# Altium PCB Section_C_EXP.PcbDoc
Units mm, origin at the board's own origin, x right, y up, seen from the top; angles counter-clockwise.
Board outline 24.3 x 27.5 mm, 2 copper layers (Top Layer, Bottom Layer), stack 1.569 mm thick; 3 components, 5 nets, 20 pads, 0 vias.
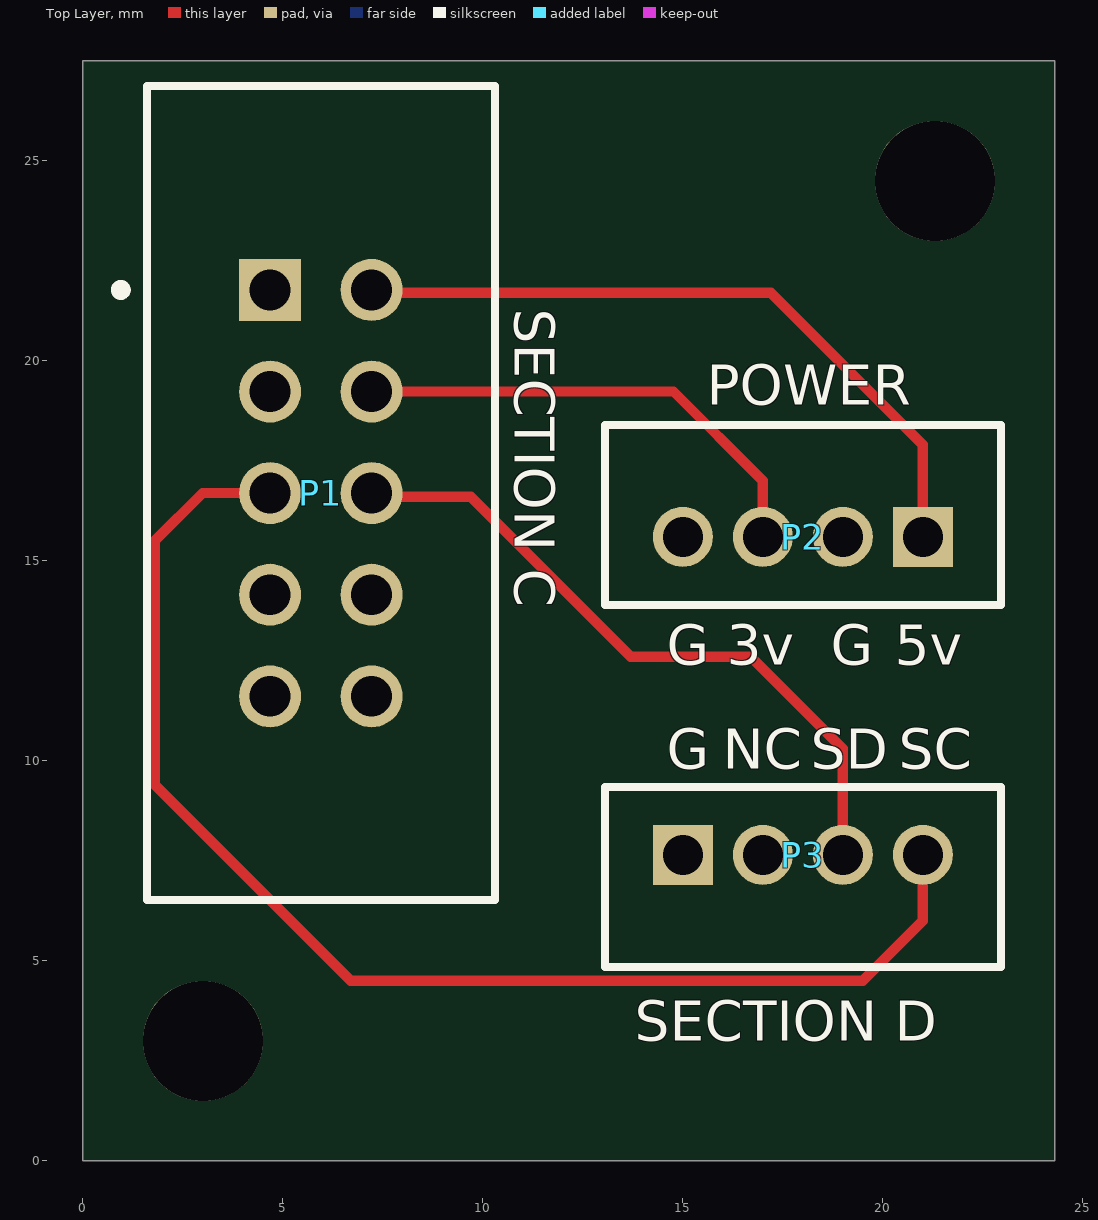
[diagram p0: Top Layer view]
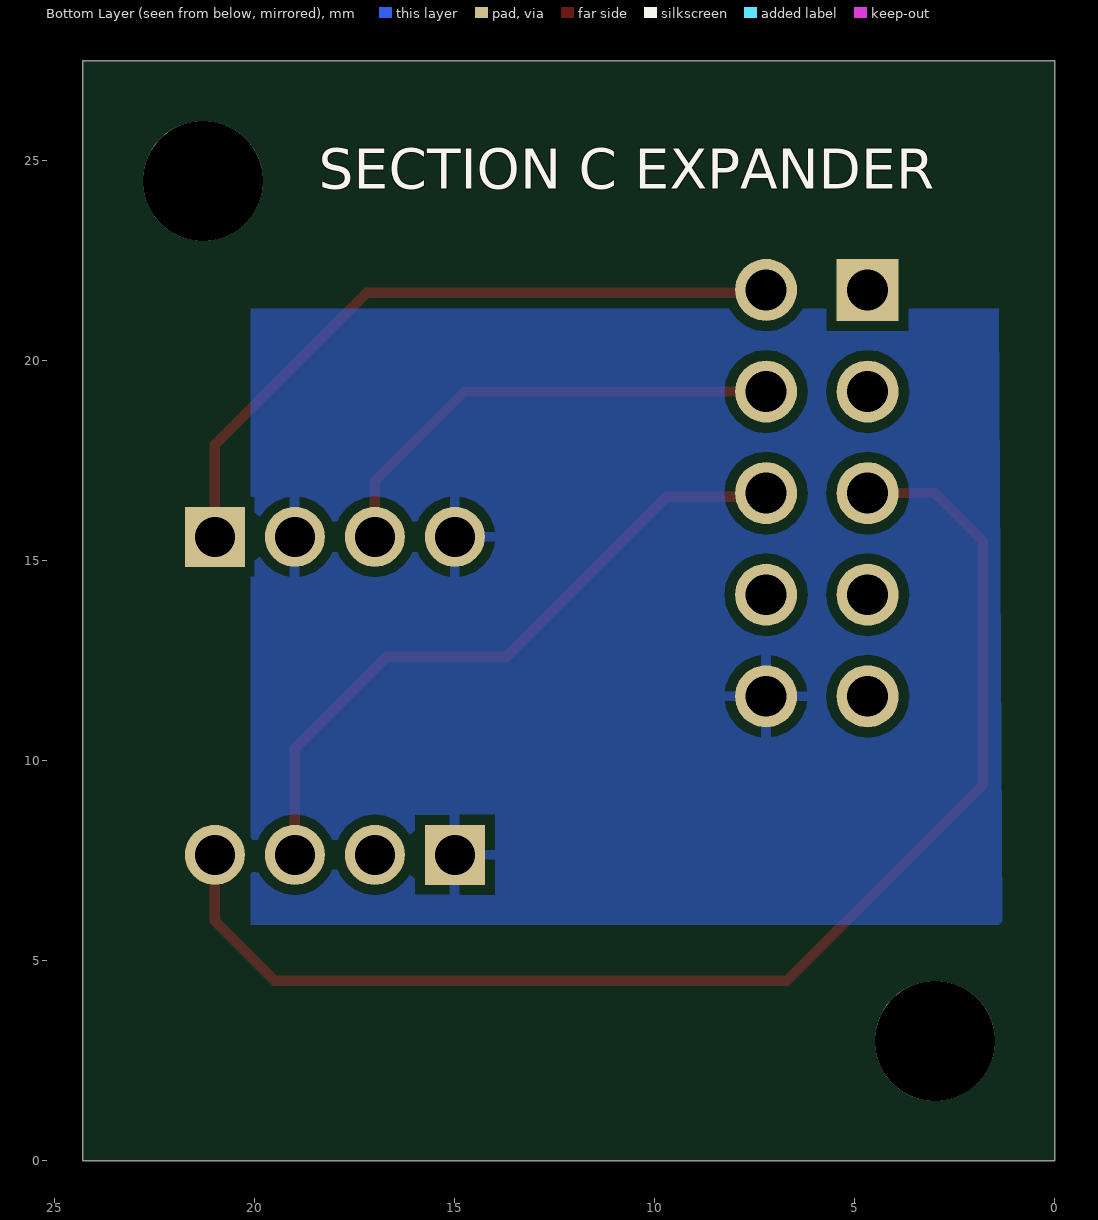
[diagram p1: Bottom Layer view, seen from below]

## Layer stack, top to bottom
Top Solder: solder mask 0.0254, SM-001, Dk 4
Top Layer: signal copper 0.035
Dielectric 1: core 1.4986, Core-043, Dk 4.3
Bottom Layer: signal copper 0.035
Bottom Solder: solder mask 0.0254, SM-001, Dk 4

## Board outline
0,0 24.3,0 24.3,27.5 0,27.5

## Design rules (kind name [scope] priority, off if disabled: settings)
Clearance [All] p1: gap=0.254 ignorepadtopadclearanceinfootprint=FALSE except(0: Arc-Hole Track-Hole SMDPad-Hole THPad-Hole Via-Hole Fill-Hole Poly-Hole Region-Hole Text-Hole)
PolygonConnect [All] p1: connectstyle=Relief reliefconductorwidth=0.254 reliefentries=4 polygonreliefangle="90 Angle" airgapwidth=0.254
RoutingVias [All] p1: holewidth=0.711 width=1.27 viastyle="Through Hole" minholewidth=0.711 minwidth=1.27 maxholewidth=0.711 maxwidth=1.27
SolderMaskExpansion [All] p1: expansion=0.102 istentingtop=FALSE
Width [All] p1: maxlimit=0.254 minlimit=0.254 preferedwidth=0.254
30 further rules are at their usual default settings.

## Components (designator, comment, footprint, x,y, rotation, side; value= is the part's Value field where it differs from the comment)
P1 "1-1634688-0" TECO-1-1634688-0-10_V 5.95,16.692 r270 top
P2 "B4B-PH-K-S(LF)(SN)" JST-B4B-PH-K-S_V 18,16.15 r180 top
P3 "B4B-PH-K-S(LF)(SN)" JST-B4B-PH-K-S_V 18,7.1 r0 top

## Footprints (in the part's own frame and the unit in brackets; to place one, negate y for a bottom-side part, rotate by r counter-clockwise, add the part's x,y. Pads: shape width x height; smd on the part's side, far side on the other; paste and mask are expansions set on the pad)
JST-B4B-PH-K-S_V [mm] "Connector, 4-Leads, Body 9.9x4.5mm, Pitch 2mm"
  rect 1.5x1.5 hole 1: 1(-3,0.55)
  round 1.5 hole 1: 2(-1,0.55) 3(1,0.55) 4(3,0.55)
  silkscreen extent -4.95,-2.25 4.95,2.25, body extent -4.95,-2.25 4.95,2.25, height 6
TECO-1-1634688-0-10_V [mm] "10-Pin Connector, Body 20.35x8.7mm, Pitch 2.54mm"
  rect 1.55x1.55 hole 1.02: 1(-5.08,-1.27)
  round 1.55 hole 1.02: 2(-5.08,1.27) 3(-2.54,-1.27) 4(-2.54,1.27) 5(0,-1.27) 6(0,1.27) 7(2.54,-1.27) 8(2.54,1.27) 9(5.08,-1.27) 10(5.08,1.27)
  silkscreen extent -10.18,-5.12 10.18,4.35, body extent -10.17,-4.35 10.18,4.65, height 9

## Part data
P1: library part CMP-2000-05854-1, "Male Header, Pitch 2.54 mm, 2 x 5 Postion, Height 9.15 mm, Tail Length 3.2 mm, -40 to 105 degC, RoHS, Bulk", Manufacturer="TE Connectivity", Package Description="10-Pin Connector, Body 20.35 x 8.7 mm, Pitch 2.54 mm", Package Version="Rev. C2, 02/2011", Contact Material=Brass, Contact Plating=GoldPlatedContacts, Contact Termination Type=ThroughHole, Datasheet URL=https://datasheet.ciiva.com/6831/eng-cd-1634688-c2-6831201.pdf, Datasheet Version="Rev. C2, 02/2011", Gender=Header, Manufacturer URL=http://www.te.com/, Mounting Technology=ThroughHole, No. of Contacts=10Contacts, No. of Positions=10, No. of Rows=2, Orientation=Straight, Package Reference=1-1634688-0, Package URL=https://datasheet.ciiva.com/6831/eng-cd-1634688-c2-6831201.pdf, PartNumber=1-1634688-0, Pitch=2.54mm, Pitch Spacing=2.54mm, Product Range=-, SVHC=ToBeAdvised
P2 P3: library part CMP-2000-05165-1, "Male Header, Pitch 2 mm, 1 x 4 Position, Height 6 mm, Tail Length 3.4 mm, -25 to 85 degC, RoHS, Bulk", Manufacturer=JST, Datasheet URL=http://datasheet.octopart.com/B4B-PH-K-S%28LF%29%28SN%29-JST-datasheet-10558886.pdf, Datasheet Version=Apr-09, Manufacturer URL=http://www.jst.com/home2.html, No of Positions=4, Pitch=2mm, Style/Orientation=StraightHeader/Plug, Termination=Crimp, Type=ShroudedHeader

## Free pads (board coordinates)
  round 3 hole 3 unplated: ""(3,3) ""(21.3,24.5)

## Nets (pads, with @x,y where several pads share a name; then routed paths per layer and width w, separated by ;. In a path a pad name is that pad's centre, name@x,y a point inside that pad or via, vN(x,y) a via of type N, cw(c..) or ccw(c..) an arc to the next point about the centre after c; other vN are vias at no path point)
+3V3: P1.4 P2.3 | length 12.3
  Top Layer w0.254: P1.4@7.352,19.1 P1.4 14.768,19.232 17,17 P2.3
+5V: P1.2 P2.1 | length 17.7
  Top Layer w0.254: P1.2@7.2,21.792 P1.2 7.292,21.7 17.2,21.7 21,17.9 P2.1
GND: P1.10 P2.2 P2.4 P3.1
SCL: P1.5 P3.4 | length 33
  Top Layer w0.254: P1.5@4.672,16.7 P1.5 2.992,16.692 1.8,15.5 1.8,9.4 6.7,4.5 19.5,4.5 21,6 P3.4
SDA: P1.6 P3.3 | length 17.1
  Top Layer w0.254: P1.6@7.228,16.7 P1.6 7.312,16.6 9.7,16.6 13.7,12.6 16.7,12.6 19,10.3 P3.3
pads on no net: P1.1 P1.3 P1.7 P1.8 P1.9 P3.2

## Polygon pours and split planes (outlines as drawn)
GND on Bottom Layer "GND_L02_P000" (solid, pour order 0): 1.4,21.3 20.1,21.3 20.1,5.9 1.308,5.9
GND on Bottom Layer "GND_L02_P002" (solid, pour order 2): -2.5,12.6
GND on Bottom Layer "GND_L02_P001" (solid, pour order 1): -0.8,10.5

## Silkscreen, mask and mechanical layers (free items; w line width, h text height)
Top Overlay:
  text "SECTION C" at 10.8,21.3 h1 r270
  text "POWER" at 15.6,18.9 h1
  text "G" at 14.6,12.4 h1
  text "3v" at 16.1,12.4 h1
  text "G" at 18.7,12.4 h1
  text "5v" at 20.3,12.4 h1
  text "G" at 14.6,9.8 h1
  text "NC" at 16,9.8 h1
  text "SD" at 18.2,9.8 h1
  text "SC" at 20.4,9.8 h1
  text "SECTION D" at 13.8,3 h1
Bottom Overlay:
  text "SECTION C EXPANDER" at 18.4,24.3 h1